# Altium PCB Quark-MP.PcbDoc
Units mil, origin at the board's own origin, x right, y up, seen from the top; angles counter-clockwise.
Board outline 1200 x 930 mil, 6 copper layers (Top1, Signal2, Gnd3, Power4, Signal5, Bottom6), stack 43.823 mil thick; 7 components, 0 nets, 703 pads, 0 vias.
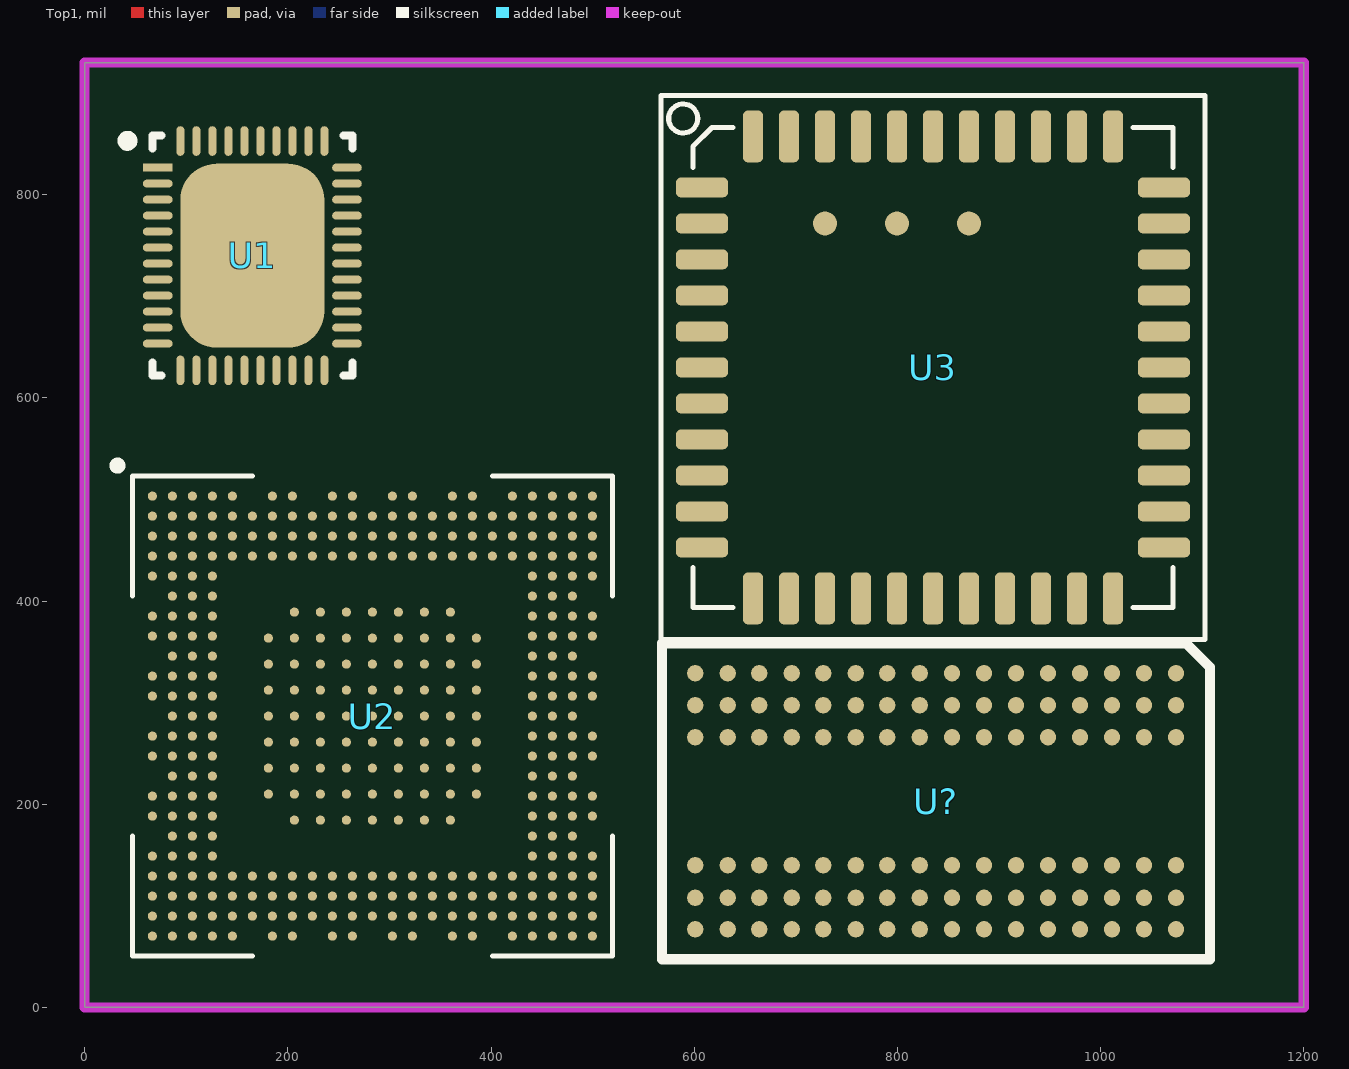
[diagram p0: Top1 view]
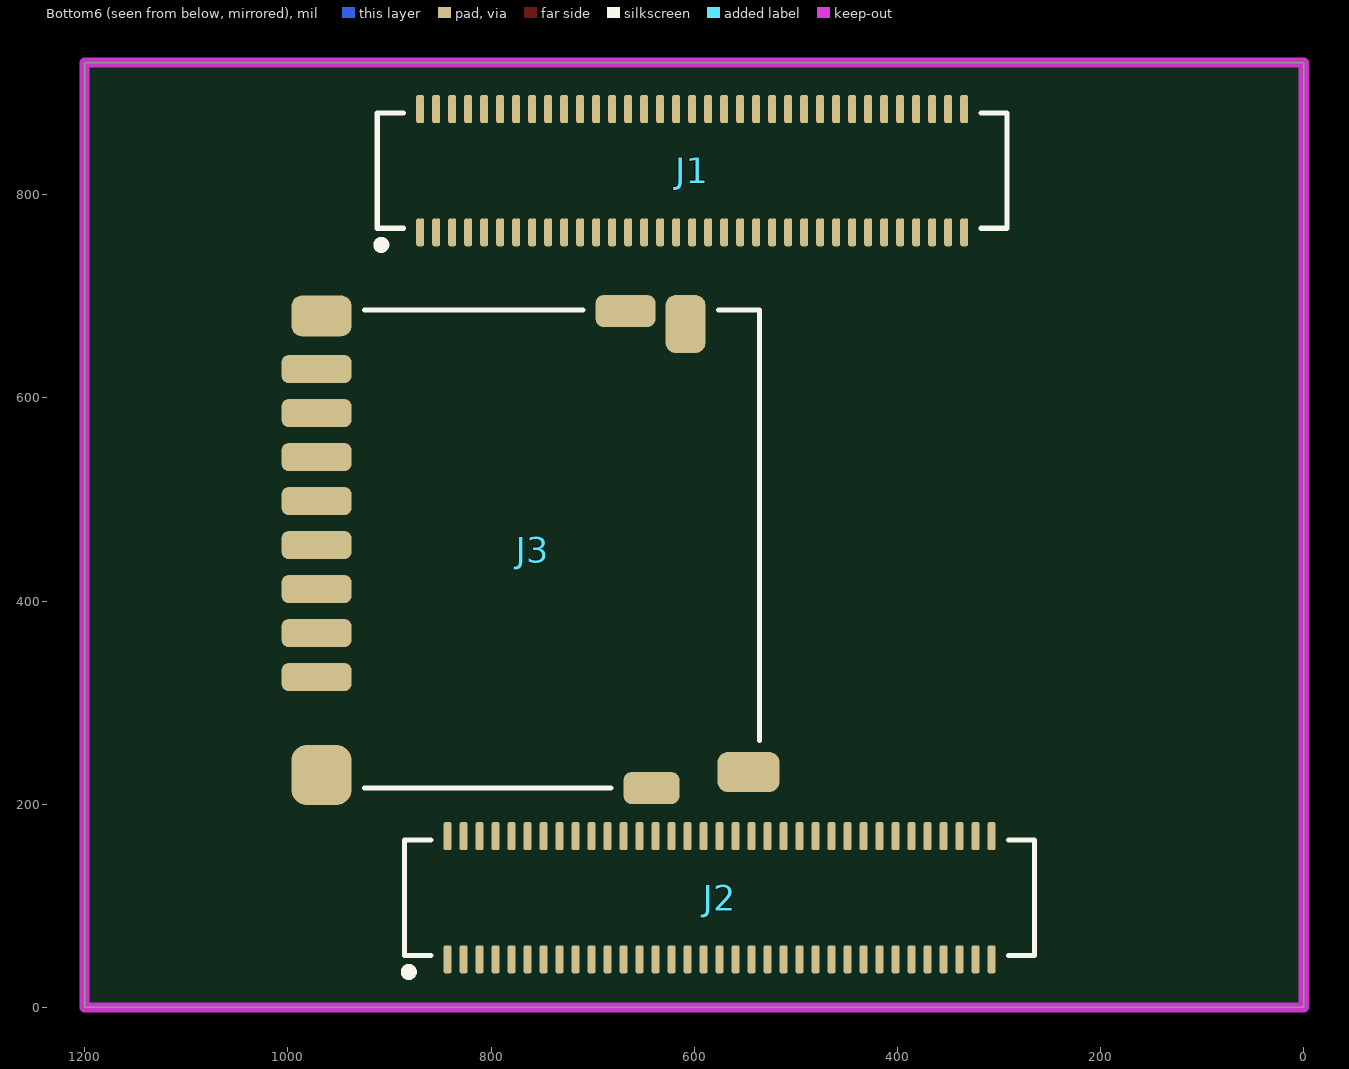
[diagram p1: Bottom6 view, seen from below]

## Layer stack, top to bottom
Top Solder: solder mask 0.4, Solder Resist, Dk 3.5
Top1: signal copper 1.4
Dielectric1: core 7.0866, FR-4, Dk 4.2
Signal2: signal copper 1.4169
Dielectric 2: prepreg 7.0866, Dk 4.2
Gnd3: signal copper 1.4173
Dielectric 3: core 7.0866, Dk 4.2
Power4: signal copper 1.378
Dielectric4: prepreg 7.0866, PP-006, Dk 4.2
Signal5: signal copper 1.378
Dielectric5: core 7.0866, FR-4, Dk 4.2
Bottom6: signal copper 1.4
Bottom Solder: solder mask 0.4, Solder Resist, Dk 3.5

## Board outline
0,0 1200,0 1200,930 0,930

## Design rules (kind name [scope] priority, off if disabled: settings)
Clearance [All] p1: gap=3 ignorepadtopadclearanceinfootprint=FALSE
ComponentClearance [All] p1: gap=0 collisioncheckmode=3 verticalgap=0 showdistances=FALSE
DiffPairsRouting [All] p1: maxlimit=10 minlimit=4 mostfreqgap=4 toplayer_minwidth=4 toplayer_maxwidth=4 toplayer_prefwidth=4 midlayer1_minwidth=4 midlayer1_maxwidth=4 midlayer1_prefwidth=4 midlayer2_minwidth=4 midlayer2_maxwidth=4 midlayer2_prefwidth=4 midlayer3_minwidth=4 midlayer3_maxwidth=4 midlayer3_prefwidth=4 midlayer4_minwidth=4 midlayer4_maxwidth=4 midlayer4_prefwidth=4 bottomlayer_minwidth=4 bottomlayer_maxwidth=4 bottomlayer_prefwidth=4 maxuncoupledlength=500
FanoutControl Fanout_BGA [All] p1: bgadir=Out bgaviamode=Centered fanoutstyle=Auto fanoutdirection=Alternating viagrid=1 // Fanout_BGA (Default Rule)
HoleSize [All] p1: absolutevalues=TRUE maxlimit=10000 minlimit=8 maxpercent=80.000 minpercent=20.000
MatchedLengths MatchedLengths_DDR_CLOCKS_STROBES [InxSignalClass('ADDR_PP1') OR InxSignalClass('DATA_BL0') OR InxSignalClass('DATA_BL1')] p1: tolerance=10 checknetsindiffpair=TRUE checkdiffpairvsdiffpair=FALSE checkxsignals=FALSE checkothers=FALSE
MatchedLengths MatchedLengths_DATA_BL1 [InxSignalClass('DATA_BL1')] p2: tolerance=10 checknetsindiffpair=FALSE checkdiffpairvsdiffpair=TRUE checkxsignals=TRUE checkothers=TRUE
MatchedLengths MatchedLengths_DATA_BL0 [InxSignalClass('DATA_BL0')] p3: tolerance=10 checknetsindiffpair=FALSE checkdiffpairvsdiffpair=TRUE checkxsignals=TRUE checkothers=TRUE
MatchedLengths MatchedLengths_ADDR_PP1 [InxSignalClass('ADDR_PP1')] p4: tolerance=10 checknetsindiffpair=FALSE checkdiffpairvsdiffpair=TRUE checkxsignals=TRUE checkothers=TRUE
MinimumSolderMaskSliver [All] p1 off: minsoldermaskwidth=2
PlaneClearance [All] p1: clearance=8
PlaneConnect [All] p1: planeconnectstyle=Direct reliefexpansion=20 reliefentries=4 reliefconductorwidth=10 reliefairgap=10
PolygonConnect [All] p1: connectstyle=Direct reliefconductorwidth=10 reliefentries=4 polygonreliefangle="90 Angle" airgapwidth=10
RoutingTopology RoutingTopology_DDRAddressAndControls [InNetClass('DDR_AddressAndControls')] p1: topology=Daisy_Simple
RoutingTopology [All] p2: topology=Shortest
RoutingVias [All] p1: holewidth=8 width=16 viastyle="Through Hole" minholewidth=6 minwidth=12 maxholewidth=28 maxwidth=50
SilkToSilkClearance [All] p1: silktosilkclearance=0
SilkToSolderMaskClearance [IsPad] p1: minsilkscreentomaskgap=0 clearancetoexposedcopper=TRUE
SolderMaskExpansion [All] p1: expansion=3
Width GND [(InNet('AGND') OR InNet('GND'))] p1: maxlimit=50 minlimit=4 preferedwidth=10
Width VCC [(InNet('VDD_SYS_3.3V') OR InNet('VDD_AV_3.3V') OR InNet('VDD_5V') OR InNet('VDD1V2-SYS') OR InNet('VDD1V1-EPHY') OR InNet('VDD-CPUX') OR InNet('VDD-CPUS') OR InNet('VDD-CPUFB') OR InNet('VCC-DRAM'))] p2: maxlimit=50 minlimit=4 preferedwidth=10
Width [All] p3: maxlimit=10000 minlimit=3 preferedwidth=3
20 further rules are at their usual default settings.

## Classes and differential pairs
component class WiFi: U3
component class SD-Card: J3
component class Connector: J1 J2
component class Power: U1
component class MPU: U2 U5

## Components (designator, comment, footprint, x,y, rotation, side; value= is the part's Value field where it differs from the comment)
J1 "DF40C-70DS-0.4V" DF40C-70DS-0.4V-MALE 601.98,823.63 r180 bottom
J2 "DF40C-70DS-0.4V" DF40C-70DS-0.4V-MALE 575,108 r180 bottom
J3 "TF-Socket" "TF-Card-Amphenol with TF" 971.72,455.17 r270 bottom
U1 "STPMIC1APQR" STMICROELECTRONICS_WFQFN44L_IPC_C 165.12,740 r0 top
U2 "STM32MP157CAC3" STM32MP157CAC3 283.23,286.77 r0 top
U3 "AP6212" AP6212 835,630 r0 top
U? "K4B4G1646D-BCK0(FBGA-96_256Mx16_DDR3-1600_11-11-11)" FBGA96(HYNIX_SAMSUNG_512MX16_DDR3)-IC 838,203 r180 top

## Footprints (in the part's own frame and the unit in brackets; to place one, negate y for a bottom-side part, rotate by r counter-clockwise, add the part's x,y. Pads: shape width x height; smd on the part's side, far side on the other; paste and mask are expansions set on the pad)
AP6212 [mm]
  rrect50% 1.3x0.5 smd: 1(-5.775,4.5) 2(-5.775,3.6) 3(-5.775,2.7) 4(-5.775,1.8) 5(-5.775,0.9) 6(-5.775,0) 7(-5.775,-0.9) 8(-5.775,-1.8) 9(-5.775,-2.7) 10(-5.775,-3.6) 11(-5.775,-4.5) 23(5.775,-4.5) 24(5.775,-3.6) 25(5.775,-2.7) 26(5.775,-1.8) 27(5.775,-0.9) 28(5.775,0) 29(5.775,0.9) 30(5.775,1.8) 31(5.775,2.7) 32(5.775,3.6) 33(5.775,4.5)
  rrect50% 0.5x1.3 smd: 12(-4.5,-5.775) 13(-3.6,-5.775) 14(-2.7,-5.775) 15(-1.8,-5.775) 16(-0.9,-5.775) 17(0,-5.775) 18(0.9,-5.775) 19(1.8,-5.775) 20(2.7,-5.775) 21(3.6,-5.775) 22(4.5,-5.775) 34(4.5,5.775) 35(3.6,5.775) 36(2.7,5.775) 37(1.8,5.775) 38(0.9,5.775) 39(0,5.775) 40(-0.9,5.775) 41(-1.8,5.775) 42(-2.7,5.775) 43(-3.6,5.775) 44(-4.5,5.775)
  round 0.6 smd: 45(-2.7,3.6) 46(-0.9,3.6) 47(0.9,3.6)
  silkscreen extent -6.8,-6.8 6.8,6.8, body extent -5.52,-5.52 5.52,5.52, height 1.5
DF40C-70DS-0.4V-MALE [mm]
  rrect50% 0.2x0.7 smd paste-1: 1(-6.8,-1.54) 2(-6.8,1.54) 3(-6.4,-1.54) 4(-6.4,1.54) 5(-6,-1.54) 6(-6,1.54) 7(-5.6,-1.54) 8(-5.6,1.54) 9(-5.2,-1.54) 10(-5.2,1.54) 11(-4.8,-1.54) 12(-4.8,1.54) 13(-4.4,-1.54) 14(-4.4,1.54) 15(-4,-1.54) 16(-4,1.54) 17(-3.6,-1.54) 18(-3.6,1.54) 19(-3.2,-1.54) 20(-3.2,1.54) 21(-2.8,-1.54) 22(-2.8,1.54) 23(-2.4,-1.54) 24(-2.4,1.54) 25(-2,-1.54) 26(-2,1.54) 27(-1.6,-1.54) 28(-1.6,1.54) 29(-1.2,-1.54) 30(-1.2,1.54) 31(-0.8,-1.54) 32(-0.8,1.54) 33(-0.4,-1.54) 34(-0.4,1.54) 35(0,-1.54) 36(0,1.54) 37(0.4,-1.54) 38(0.4,1.54) 39(0.8,-1.54) 40(0.8,1.54) 41(1.2,-1.54) 42(1.2,1.54) 43(1.6,-1.54) 44(1.6,1.54) 45(2,-1.54) 46(2,1.54) 47(2.4,-1.54) 48(2.4,1.54) 49(2.8,-1.54) 50(2.8,1.54) 51(3.2,-1.54) 52(3.2,1.54) 53(3.6,-1.54) 54(3.6,1.54) 55(4,-1.54) 56(4,1.54) 57(4.4,-1.54) 58(4.4,1.54) 59(4.8,-1.54) 60(4.8,1.54) 61(5.2,-1.54) 62(5.2,1.54) 63(5.6,-1.54) 64(5.6,1.54) 65(6,-1.54) 66(6,1.54) 67(6.4,-1.54) 68(6.4,1.54) 69(6.8,-1.54) 70(6.8,1.54)
  silkscreen extent -7.87,-1.95 7.87,1.44, body extent -7.76,-1.48 7.76,1.49, height 1.09
FBGA96(HYNIX_SAMSUNG_512MX16_DDR3)-IC [mil] "FBGA96(HYNIX_SAMSUNG_512MX16_DDR3)"
  rrect100% 16x16 smd: A1(-236.22,-125.98) A2(-236.22,-94.49) A3(-236.22,-62.99) A7(-236.22,63) A8(-236.22,95) A9(-236.22,126) B1(-204.72,-125.98) B2(-204.72,-94.49) B3(-204.72,-62.99) B7(-204.72,63) B8(-204.72,95) B9(-204.72,126) C1(-173.23,-125.98) C2(-173.23,-94.49) C3(-173.23,-62.99) C7(-173.23,63) C8(-173.23,95) C9(-173.23,126) D1(-141.73,-125.98) D2(-141.73,-94.49) D3(-141.73,-62.99) D7(-141.73,63) D8(-141.73,95) D9(-141.73,126) E1(-110.24,-125.98) E2(-110.24,-94.49) E3(-110.24,-62.99) E7(-110.24,63) E8(-110.24,95) E9(-110.24,126) F1(-78.74,-125.98) F2(-78.74,-94.49) F3(-78.74,-62.99) F7(-78.74,63) F8(-78.74,95) F9(-78.74,126) G1(-47.24,-125.98) G2(-47.24,-94.49) G3(-47.24,-62.99) G7(-47.24,63) G8(-47.24,95) G9(-47.24,126) H1(-15.75,-125.98) H2(-15.75,-94.49) H3(-15.75,-62.99) H7(-15.75,63) H8(-15.75,95) H9(-15.75,126) J1(16,-125.98) J2(16,-94.49) J3(16,-62.99) J7(16,63) J8(16,95) J9(16,126) K1(48,-125.98) K2(48,-94.49) K3(48,-62.99) K7(48,63) K8(48,95) K9(48,126) L1(79,-125.98) L2(79,-94.49) L3(79,-62.99) L7(79,63) L8(79,95) L9(79,126) M1(111,-125.98) M2(111,-94.49) M3(111,-62.99) M7(111,63) M8(111,95) M9(111,126) N1(142,-125.98) N2(142,-94.49) N3(142,-62.99) N7(142,63) N8(142,95) N9(142,126) P1(174,-125.98) P2(174,-94.49) P3(174,-62.99) P7(174,63) P8(174,95) P9(174,126) R1(205,-125.98) R2(205,-94.49) R3(205,-62.99) R7(205,63) R8(205,95) R9(205,126) T1(237,-125.98) T2(237,-94.49) T3(237,-62.99) T7(237,63) T8(237,95) T9(237,126)
  silkscreen extent -270,-156 270,156, body extent -266,-147 266,147, height 48
STM32MP157CAC3 [mm]
  round 0.23 smd mask+0: 1A2(-1.95,2.6) 1A3(-1.3,2.6) 1A4(-0.65,2.6) 1A5(0,2.6) 1A6(0.65,2.6) 1A7(1.3,2.6) 1A8(1.95,2.6) 1B1(-2.6,1.95) 1B2(-1.95,1.95) 1B3(-1.3,1.95) 1B4(-0.65,1.95) 1B5(0,1.95) 1B6(0.65,1.95) 1B7(1.3,1.95) 1B8(1.95,1.95) 1B9(2.6,1.95) 1C1(-2.6,1.3) 1C2(-1.95,1.3) 1C3(-1.3,1.3) 1C4(-0.65,1.3) 1C5(0,1.3) 1C6(0.65,1.3) 1C7(1.3,1.3) 1C8(1.95,1.3) 1C9(2.6,1.3) 1D1(-2.6,0.65) 1D2(-1.95,0.65) 1D3(-1.3,0.65) 1D4(-0.65,0.65) 1D5(0,0.65) 1D6(0.65,0.65) 1D7(1.3,0.65) 1D8(1.95,0.65) 1D9(2.6,0.65) 1E1(-2.6,0) 1E2(-1.95,0) 1E3(-1.3,0) 1E4(-0.65,0) 1E5(0,0) 1E6(0.65,0) 1E7(1.3,0) 1E8(1.95,0) 1E9(2.6,0) 1F1(-2.6,-0.65) 1F2(-1.95,-0.65) 1F3(-1.3,-0.65) 1F4(-0.65,-0.65) 1F5(0,-0.65) 1F6(0.65,-0.65) 1F7(1.3,-0.65) 1F8(1.95,-0.65) 1F9(2.6,-0.65) 1G1(-2.6,-1.3) 1G2(-1.95,-1.3) 1G3(-1.3,-1.3) 1G4(-0.65,-1.3) 1G5(0,-1.3) 1G6(0.65,-1.3) 1G7(1.3,-1.3) 1G8(1.95,-1.3) 1G9(2.6,-1.3) 1H1(-2.6,-1.95) 1H2(-1.95,-1.95) 1H3(-1.3,-1.95) 1H4(-0.65,-1.95) 1H5(0,-1.95) 1H6(0.65,-1.95) 1H7(1.3,-1.95) 1H8(1.95,-1.95) 1H9(2.6,-1.95) 1J2(-1.95,-2.6) 1J3(-1.3,-2.6) 1J4(-0.65,-2.6) 1J5(0,-2.6) 1J6(0.65,-2.6) 1J7(1.3,-2.6) 1J8(1.95,-2.6) A1(-5.5,5.5) A2(-5,5.5) A3(-4.5,5.5) A4(-4,5.5) A5(-3.5,5.5) A7(-2.5,5.5) A8(-2,5.5) A10(-1,5.5) A11(-0.5,5.5) A13(0.5,5.5) A14(1,5.5) A16(2,5.5) A17(2.5,5.5) A19(3.5,5.5) A20(4,5.5) A21(4.5,5.5) A22(5,5.5) A23(5.5,5.5) AA1(-5.5,-4.5) AA2(-5,-4.5) AA3(-4.5,-4.5) AA4(-4,-4.5) AA5(-3.5,-4.5) AA6(-3,-4.5) AA7(-2.5,-4.5) AA8(-2,-4.5) AA9(-1.5,-4.5) AA10(-1,-4.5) AA11(-0.5,-4.5) AA12(0,-4.5) AA13(0.5,-4.5) AA14(1,-4.5) AA15(1.5,-4.5) AA16(2,-4.5) AA17(2.5,-4.5) AA18(3,-4.5) AA19(3.5,-4.5) AA20(4,-4.5) AA21(4.5,-4.5) AA22(5,-4.5) AA23(5.5,-4.5) AB1(-5.5,-5) AB2(-5,-5) AB3(-4.5,-5) AB4(-4,-5) AB5(-3.5,-5) AB6(-3,-5) AB7(-2.5,-5) AB8(-2,-5) AB9(-1.5,-5) AB10(-1,-5) AB11(-0.5,-5) AB12(0,-5) AB13(0.5,-5) AB14(1,-5) AB15(1.5,-5) AB16(2,-5) AB17(2.5,-5) AB18(3,-5) AB19(3.5,-5) AB20(4,-5) AB21(4.5,-5) AB22(5,-5) AB23(5.5,-5) AC1(-5.5,-5.5) AC2(-5,-5.5) AC3(-4.5,-5.5) AC4(-4,-5.5) AC5(-3.5,-5.5) AC7(-2.5,-5.5) AC8(-2,-5.5) AC10(-1,-5.5) AC11(-0.5,-5.5) AC13(0.5,-5.5) AC14(1,-5.5) AC16(2,-5.5) AC17(2.5,-5.5) AC19(3.5,-5.5) AC20(4,-5.5) AC21(4.5,-5.5) AC22(5,-5.5) AC23(5.5,-5.5) B1(-5.5,5) B2(-5,5) B3(-4.5,5) B4(-4,5) B5(-3.5,5) B6(-3,5) B7(-2.5,5) B8(-2,5) B9(-1.5,5) B10(-1,5) B11(-0.5,5) B12(0,5) B13(0.5,5) B14(1,5) B15(1.5,5) B16(2,5) B17(2.5,5) B18(3,5) B19(3.5,5) B20(4,5) B21(4.5,5) B22(5,5) B23(5.5,5) C1(-5.5,4.5) C2(-5,4.5) C3(-4.5,4.5) C4(-4,4.5) C5(-3.5,4.5) C6(-3,4.5) C7(-2.5,4.5) C8(-2,4.5) C9(-1.5,4.5) C10(-1,4.5) C11(-0.5,4.5) C12(0,4.5) C13(0.5,4.5) C14(1,4.5) C15(1.5,4.5) C16(2,4.5) C17(2.5,4.5) C18(3,4.5) C19(3.5,4.5) C20(4,4.5) C21(4.5,4.5) C22(5,4.5) C23(5.5,4.5) D1(-5.5,4) D2(-5,4) D3(-4.5,4) D4(-4,4) D5(-3.5,4) D6(-3,4) D7(-2.5,4) D8(-2,4) D9(-1.5,4) D10(-1,4) D11(-0.5,4) D12(0,4) D13(0.5,4) D14(1,4) D15(1.5,4) D16(2,4) D17(2.5,4) D18(3,4) D19(3.5,4) D20(4,4) D21(4.5,4) D22(5,4) D23(5.5,4) E1(-5.5,3.5) E2(-5,3.5) E3(-4.5,3.5) E4(-4,3.5) E20(4,3.5) E21(4.5,3.5) E22(5,3.5) E23(5.5,3.5) F2(-5,3) F3(-4.5,3) F4(-4,3) F20(4,3) F21(4.5,3) F22(5,3) G1(-5.5,2.5) G2(-5,2.5) G3(-4.5,2.5) G4(-4,2.5) G20(4,2.5) G21(4.5,2.5) G22(5,2.5) G23(5.5,2.5) H1(-5.5,2) H2(-5,2) H3(-4.5,2) H4(-4,2) H20(4,2) H21(4.5,2) H22(5,2) H23(5.5,2) J2(-5,1.5) J3(-4.5,1.5) J4(-4,1.5) J20(4,1.5) J21(4.5,1.5) J22(5,1.5) K1(-5.5,1) K2(-5,1) K3(-4.5,1) K4(-4,1) K20(4,1) K21(4.5,1) K22(5,1) K23(5.5,1) L1(-5.5,0.5) L2(-5,0.5) L3(-4.5,0.5) L4(-4,0.5) L20(4,0.5) L21(4.5,0.5) L22(5,0.5) L23(5.5,0.5) M2(-5,0) M3(-4.5,0) M4(-4,0) M20(4,0) M21(4.5,0) M22(5,0) N1(-5.5,-0.5) N2(-5,-0.5) N3(-4.5,-0.5) N4(-4,-0.5) N20(4,-0.5) N21(4.5,-0.5) N22(5,-0.5) N23(5.5,-0.5) P1(-5.5,-1) P2(-5,-1) P3(-4.5,-1) P4(-4,-1) P20(4,-1) P21(4.5,-1) P22(5,-1) P23(5.5,-1) R2(-5,-1.5) R3(-4.5,-1.5) R4(-4,-1.5) R20(4,-1.5) R21(4.5,-1.5) R22(5,-1.5) T1(-5.5,-2) T2(-5,-2) T3(-4.5,-2) T4(-4,-2) T20(4,-2) T21(4.5,-2) T22(5,-2) T23(5.5,-2) U1(-5.5,-2.5) U2(-5,-2.5) U3(-4.5,-2.5) U4(-4,-2.5) U20(4,-2.5) U21(4.5,-2.5) U22(5,-2.5) U23(5.5,-2.5) V2(-5,-3) V3(-4.5,-3) V4(-4,-3) V20(4,-3) V21(4.5,-3) V22(5,-3) W1(-5.5,-3.5) W2(-5,-3.5) W3(-4.5,-3.5) W4(-4,-3.5) W20(4,-3.5) W21(4.5,-3.5) W22(5,-3.5) W23(5.5,-3.5) Y1(-5.5,-4) Y2(-5,-4) Y3(-4.5,-4) Y4(-4,-4) Y5(-3.5,-4) Y6(-3,-4) Y7(-2.5,-4) Y8(-2,-4) Y9(-1.5,-4) Y10(-1,-4) Y11(-0.5,-4) Y12(0,-4) Y13(0.5,-4) Y14(1,-4) Y15(1.5,-4) Y16(2,-4) Y17(2.5,-4) Y18(3,-4) Y19(3.5,-4) Y20(4,-4) Y21(4.5,-4) Y22(5,-4) Y23(5.5,-4)
  silkscreen extent -6.47,-6 6,6.36, body extent -6,-6 6,6, height 0.8
STMICROELECTRONICS_WFQFN44L_IPC_C [mm]
  rect 0.74x0.202 smd paste+0 mask+0: 1(-2.365,2.2)
  rrect100% 0.74x0.202 smd paste+0 mask+0: 2(-2.365,1.8) 3(-2.365,1.4) 4(-2.365,1) 5(-2.365,0.6) 6(-2.365,0.2) 7(-2.365,-0.2) 8(-2.365,-0.6) 9(-2.365,-1) 10(-2.365,-1.4) 11(-2.365,-1.8) 12(-2.365,-2.2) 23(2.366,-2.2) 24(2.366,-1.8) 25(2.366,-1.4) 26(2.366,-1) 27(2.366,-0.6) 28(2.366,-0.2) 29(2.366,0.2) 30(2.366,0.6) 31(2.366,1) 32(2.366,1.4) 33(2.366,1.8) 34(2.366,2.2)
  rrect100% 0.202x0.74 smd paste+0 mask+0: 13(-1.8,-2.866) 14(-1.4,-2.866) 15(-1,-2.866) 16(-0.6,-2.866) 17(-0.2,-2.866) 18(0.2,-2.866) 19(0.6,-2.866) 20(1,-2.866) 21(1.4,-2.866) 22(1.8,-2.866) 35(1.8,2.866) 36(1.4,2.866) 37(1,2.866) 38(0.6,2.866) 39(0.2,2.866) 40(-0.2,2.866) 41(-0.6,2.866) 42(-1,2.866) 43(-1.4,2.866) 44(-1.8,2.866)
  rrect50% 3.6x4.6 smd paste-1000 mask+0: 45(0,0)
  silkscreen extent -3.25,-3 2.5,3, body extent -2.84,-3.34 2.84,3.34, height 0.25
"TF-Card-Amphenol with TF" [mm]
  rrect50% 0.7x1.75 smd: 1(3.3,0) 2(2.2,0) 3(1.1,0) 4(0,0) 5(-1.1,0) 6(-2.2,0) 7(-3.3,0) 8(-4.4,0)
  rrect50% 1x1.55 smd: 9(5.675,10.8)
  rrect50% 1.45x1 smd: 10(-5.525,9.225)
  rrect50% 1.5x1.5 smd: S1(5.75,0.125)
  rrect50% 1.016x1.5 smd: S2(-5.727,0.125)
  rrect50% 0.8x1.4 smd: S3(6.075,8.375)
  rrect50% 0.8x1.5 smd: S4(-5.85,7.725)
  silkscreen extent -5.87,1.19 6.07,11.07, body extent -5.85,-5.58 6.15,11.06, height 1.69

## Part data
J1 J2: "70 Position Connector Receptacle, Center Strip Contacts Surface Mount Gold", Package=None, Availability=Unavailable, MF=Hirose, MP=DF40C-70DS-0.4V_51_, Price=None, SnapEDA_Link=https://www.snapeda.com/parts/DF40C-70DS-0.4V%2851%29/Hirose%20Electric%20Co%20Ltd/view-part/50152/?ref=snap
J3: "10 _8 + 2_ Position Card Connector Secure Digital - microSDa?￠ Surface Mount, Right Angle Gold", Package=None, Availability=Unavailable, MF="Amphenol Commercial Products", MP=1140084168, Price=None, SnapEDA_Link=https://www.snapeda.com/parts/1140084168/Amphenol/view-part/4544529/?ref=snap
U2: "ARM? Cortex?-A7 Microprocessor IC STM32MP1 2 Core, 32-Bit 209MHz, 650MHz 361-TFBGA (12x12)", Package="TFBGA-361 STMicroelectronics", Availability=Bad, DigiKey-Purchase-URL=https://snapeda.com/shop?store=DigiKey&id=3660522, MF=STMicroelectronics, Mouser-Purchase-URL=https://snapeda.com/shop?store=Mouser&id=3660522, MP=STM32MP157AAC3, Price=None, SnapEDA_Link=https://www.snapeda.com/parts/STM32MP157AAC3/STMicroelectronics/view-part/3660522/?ref=snap
U?: library part K4B8G1646Q-MYK0(FBGA-96_512MX16_DDR3-1600)
U3: Device=APSERIES, ORCAD_LIB=MODULE, QVL=AMPAK

## Nets (pads, with @x,y where several pads share a name; then routed paths per layer and width w, separated by ;. In a path a pad name is that pad's centre, name@x,y a point inside that pad or via, vN(x,y) a via of type N, cw(c..) or ccw(c..) an arc to the next point about the centre after c; other vN are vias at no path point)
pads on no net: J1.1 J1.2 J1.3 J1.4 J1.5 J1.6 J1.7 J1.8 J1.9 J1.10 J1.11 J1.12 J1.13 J1.14 J1.15 J1.16 J1.17 J1.18 J1.19 J1.20 J1.21 J1.22 J1.23 J1.24 J1.25 J1.26 J1.27 J1.28 J1.29 J1.30 J1.31 J1.32 J1.33 J1.34 J1.35 J1.36 J1.37 J1.38 J1.39 J1.40 J1.41 J1.42 J1.43 J1.44 J1.45 J1.46 J1.47 J1.48 J1.49 J1.50 J1.51 J1.52 J1.53 J1.54 J1.55 J1.56 J1.57 J1.58 J1.59 J1.60 J1.61 J1.62 J1.63 J1.64 J1.65 J1.66 J1.67 J1.68 J1.69 J1.70 J2.1 J2.2 J2.3 J2.4 J2.5 J2.6 J2.7 J2.8 J2.9 J2.10 J2.11 J2.12 J2.13 J2.14 J2.15 J2.16 J2.17 J2.18 J2.19 J2.20 J2.21 J2.22 J2.23 J2.24 J2.25 J2.26 J2.27 J2.28 J2.29 J2.30 J2.31 J2.32 J2.33 J2.34 J2.35 J2.36 J2.37 J2.38 J2.39 J2.40 J2.41 J2.42 J2.43 J2.44 J2.45 J2.46 J2.47 J2.48 J2.49 J2.50 J2.51 J2.52 J2.53 J2.54 J2.55 J2.56 J2.57 J2.58 J2.59 J2.60 J2.61 J2.62 J2.63 J2.64 J2.65 J2.66 J2.67 J2.68 J2.69 J2.70 J3.1 J3.2 J3.3 J3.4 J3.5 J3.6 J3.7 J3.8 J3.9 J3.10 J3.S1 J3.S2 J3.S3 J3.S4 U1.1 U1.2 U1.3 U1.4 U1.5 U1.6 U1.7 U1.8 U1.9 U1.10 U1.11 U1.12 U1.13 U1.14 U1.15 U1.16 U1.17 U1.18 U1.19 U1.20 U1.21 U1.22 U1.23 U1.24 U1.25 U1.26 U1.27 U1.28 U1.29 U1.30 U1.31 U1.32 U1.33 U1.34 U1.35 U1.36 U1.37 U1.38 U1.39 U1.40 U1.41 U1.42 U1.43 U1.44 U1.45 U2.1A2 U2.1A3 U2.1A4 U2.1A5 U2.1A6 U2.1A7 U2.1A8 U2.1B1 U2.1B2 U2.1B3 U2.1B4 U2.1B5 U2.1B6 U2.1B7 U2.1B8 U2.1B9 U2.1C1 U2.1C2 U2.1C3 U2.1C4 U2.1C5 U2.1C6 U2.1C7 U2.1C8 U2.1C9 U2.1D1 U2.1D2 U2.1D3 U2.1D4 U2.1D5 U2.1D6 U2.1D7 U2.1D8 U2.1D9 U2.1E1 U2.1E2 U2.1E3 U2.1E4 U2.1E5 U2.1E6 U2.1E7 U2.1E8 U2.1E9 U2.1F1 U2.1F2 U2.1F3 U2.1F4 U2.1F5 U2.1F6 U2.1F7 U2.1F8 U2.1F9 U2.1G1 U2.1G2 U2.1G3 U2.1G4 U2.1G5 U2.1G6 U2.1G7 U2.1G8 U2.1G9 U2.1H1 U2.1H2 U2.1H3 U2.1H4 U2.1H5 U2.1H6 U2.1H7 U2.1H8 U2.1H9 U2.1J2 U2.1J3 U2.1J4 U2.1J5 U2.1J6 U2.1J7 U2.1J8 U2.A1 U2.A2 U2.A3 U2.A4 U2.A5 U2.A7 U2.A8 U2.A10 U2.A11 U2.A13 U2.A14 U2.A16 U2.A17 U2.A19 U2.A20 U2.A21 U2.A22 U2.A23 U2.AA1 U2.AA2 U2.AA3 U2.AA4 U2.AA5 U2.AA6 U2.AA7 U2.AA8 U2.AA9 U2.AA10 U2.AA11 U2.AA12 U2.AA13 U2.AA14 U2.AA15 U2.AA16 U2.AA17 U2.AA18 U2.AA19 U2.AA20 U2.AA21 U2.AA22 U2.AA23 U2.AB1 U2.AB2 U2.AB3 U2.AB4 U2.AB5 U2.AB6 U2.AB7 U2.AB8 U2.AB9 U2.AB10 U2.AB11 U2.AB12 U2.AB13 U2.AB14 U2.AB15 U2.AB16 U2.AB17 U2.AB18 U2.AB19 U2.AB20 U2.AB21 U2.AB22 U2.AB23 U2.AC1 U2.AC2 U2.AC3 U2.AC4 U2.AC5 U2.AC7 U2.AC8 U2.AC10 U2.AC11 U2.AC13 U2.AC14 U2.AC16 U2.AC17 U2.AC19 U2.AC20 U2.AC21 U2.AC22 U2.AC23 U2.B1 U2.B2 U2.B3 U2.B4 U2.B5 U2.B6 U2.B7 U2.B8 U2.B9 U2.B10 U2.B11 U2.B12 U2.B13 U2.B14 U2.B15 U2.B16 U2.B17 U2.B18 U2.B19 U2.B20 U2.B21 U2.B22 U2.B23 U2.C1 U2.C2 U2.C3 U2.C4 U2.C5 U2.C6 U2.C7 U2.C8 U2.C9 U2.C10 U2.C11 U2.C12 U2.C13 U2.C14 U2.C15 U2.C16 U2.C17 U2.C18 U2.C19 U2.C20 U2.C21 U2.C22 U2.C23 U2.D1 U2.D2 U2.D3 U2.D4 U2.D5 U2.D6 U2.D7 U2.D8 U2.D9 U2.D10 U2.D11 U2.D12 U2.D13 U2.D14 U2.D15 U2.D16 U2.D17 U2.D18 U2.D19 U2.D20 U2.D21 U2.D22 U2.D23 U2.E1 U2.E2 U2.E3 U2.E4 U2.E20 U2.E21 U2.E22 U2.E23 U2.F2 U2.F3 U2.F4 U2.F20 U2.F21 U2.F22 U2.G1 U2.G2 U2.G3 U2.G4 U2.G20 U2.G21 U2.G22 U2.G23 U2.H1 U2.H2 U2.H3 U2.H4 U2.H20 U2.H21 U2.H22 U2.H23 U2.J2 U2.J3 U2.J4 U2.J20 U2.J21 U2.J22 U2.K1 U2.K2 U2.K3 U2.K4 U2.K20 U2.K21 U2.K22 U2.K23 U2.L1 U2.L2 U2.L3 U2.L4 U2.L20 U2.L21 U2.L22 U2.L23 U2.M2 U2.M3 U2.M4 U2.M20 U2.M21 U2.M22 U2.N1 U2.N2 U2.N3 U2.N4 U2.N20 U2.N21 U2.N22 U2.N23 U2.P1 U2.P2 U2.P3 U2.P4 U2.P20 U2.P21 U2.P22 U2.P23 U2.R2 U2.R3 U2.R4 U2.R20 U2.R21 U2.R22 U2.T1 U2.T2 U2.T3 U2.T4 U2.T20 U2.T21 U2.T22 U2.T23 U2.U1 U2.U2 U2.U3 U2.U4 U2.U20 U2.U21 U2.U22 U2.U23 U2.V2 U2.V3 U2.V4 U2.V20 U2.V21 U2.V22 U2.W1 U2.W2 U2.W3 U2.W4 U2.W20 U2.W21 U2.W22 U2.W23 U2.Y1 U2.Y2 U2.Y3 U2.Y4 U2.Y5 U2.Y6 U2.Y7 U2.Y8 U2.Y9 U2.Y10 U2.Y11 U2.Y12 U2.Y13 U2.Y14 U2.Y15 U2.Y16 U2.Y17 U2.Y18 U2.Y19 U2.Y20 U2.Y21 U2.Y22 U2.Y23 U3.1 U3.2 U3.3 U3.4 U3.5 U3.6 U3.7 U3.8 U3.9 U3.10 U3.11 U3.12 U3.13 U3.14 U3.15 U3.16 U3.17 U3.18 U3.19 U3.20 U3.21 U3.22 U3.23 U3.24 U3.25 U3.26 U3.27 U3.28 U3.29 U3.30 U3.31 U3.32 U3.33 U3.34 U3.35 U3.36 U3.37 U3.38 U3.39 U3.40 U3.41 U3.42 U3.43 U3.44 U3.45 U3.46 U3.47 U?.A1 U?.A2 U?.A3 U?.A7 U?.A8 U?.A9 U?.B1 U?.B2 U?.B3 U?.B7 U?.B8 U?.B9 U?.C1 U?.C2 U?.C3 U?.C7 U?.C8 U?.C9 U?.D1 U?.D2 U?.D3 U?.D7 U?.D8 U?.D9 U?.E1 U?.E2 U?.E3 U?.E7 U?.E8 U?.E9 U?.F1 U?.F2 U?.F3 U?.F7 U?.F8 U?.F9 U?.G1 U?.G2 U?.G3 U?.G7 U?.G8 U?.G9 U?.H1 U?.H2 U?.H3 U?.H7 U?.H8 U?.H9 U?.J1 U?.J2 U?.J3 U?.J7 U?.J8 U?.J9 U?.K1 U?.K2 U?.K3 U?.K7 U?.K8 U?.K9 U?.L1 U?.L2 U?.L3 U?.L7 U?.L8 U?.L9 U?.M1 U?.M2 U?.M3 U?.M7 U?.M8 U?.M9 U?.N1 U?.N2 U?.N3 U?.N7 U?.N8 U?.N9 U?.P1 U?.P2 U?.P3 U?.P7 U?.P8 U?.P9 U?.R1 U?.R2 U?.R3 U?.R7 U?.R8 U?.R9 U?.T1 U?.T2 U?.T3 U?.T7 U?.T8 U?.T9

## Keep-outs
Keep-Out Layer:
  the board outline again, w10